# Altium PCB ESP8266_V1.0.PcbDoc
Units mil, origin at the board's own origin, x right, y up, seen from the top; angles counter-clockwise.
Board outline 2292.91 x 1228.37 mil, 2 copper layers (Top Layer, Bottom Layer); 28 components, 37 nets, 164 pads, 164 vias.
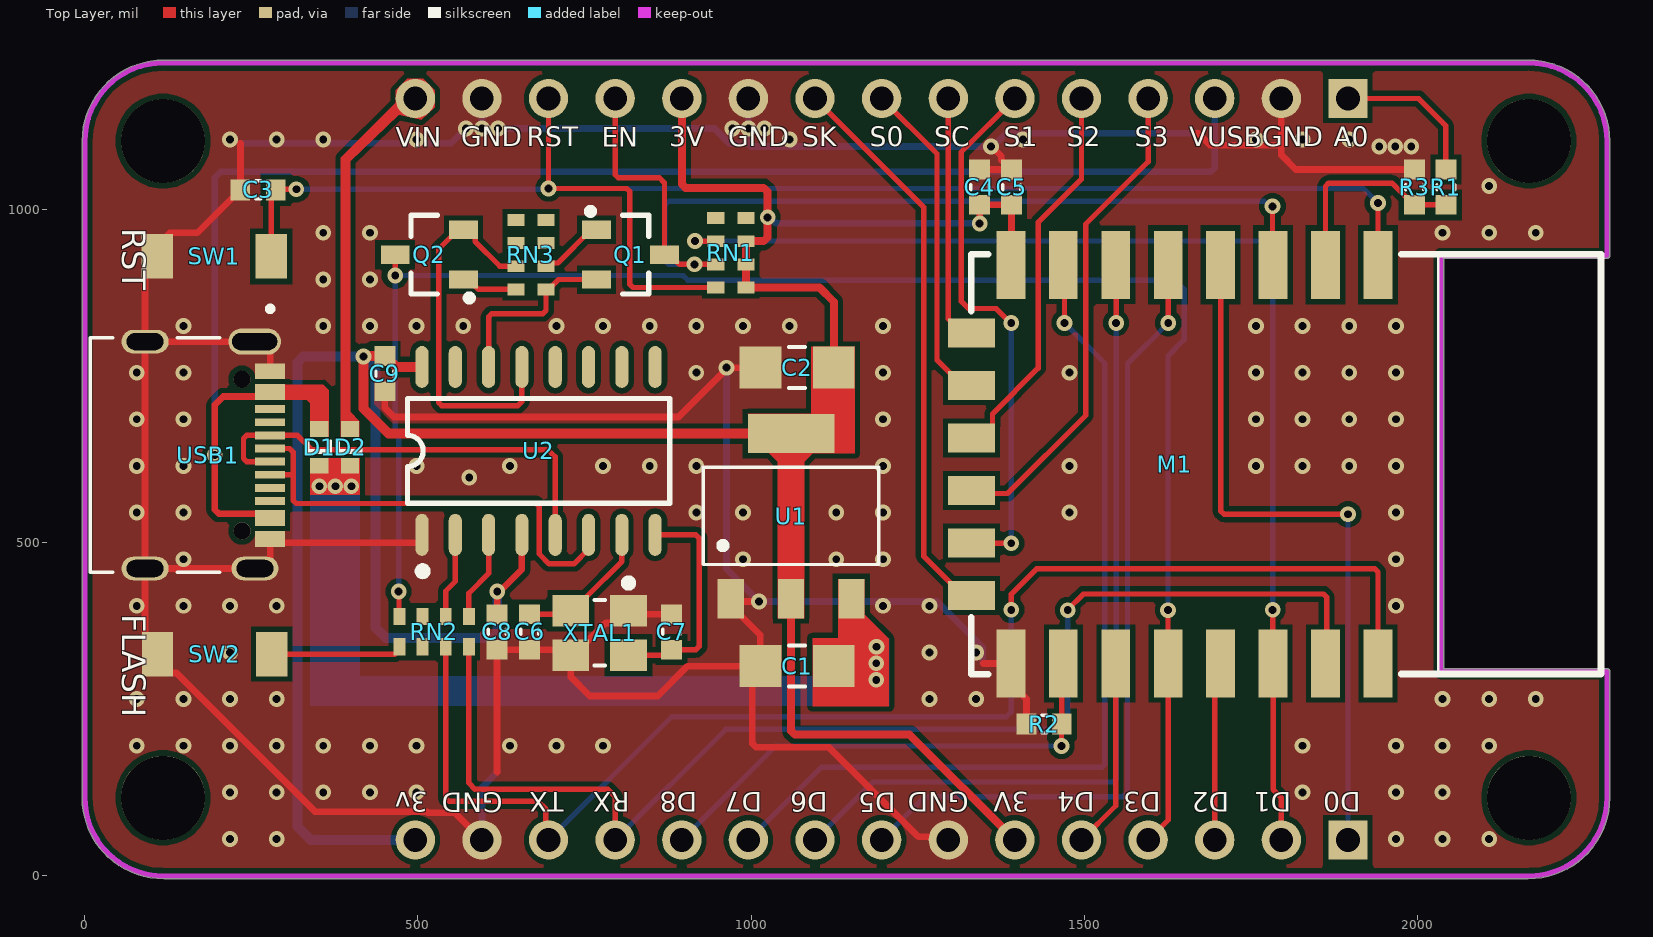
[diagram p0: Top Layer view]
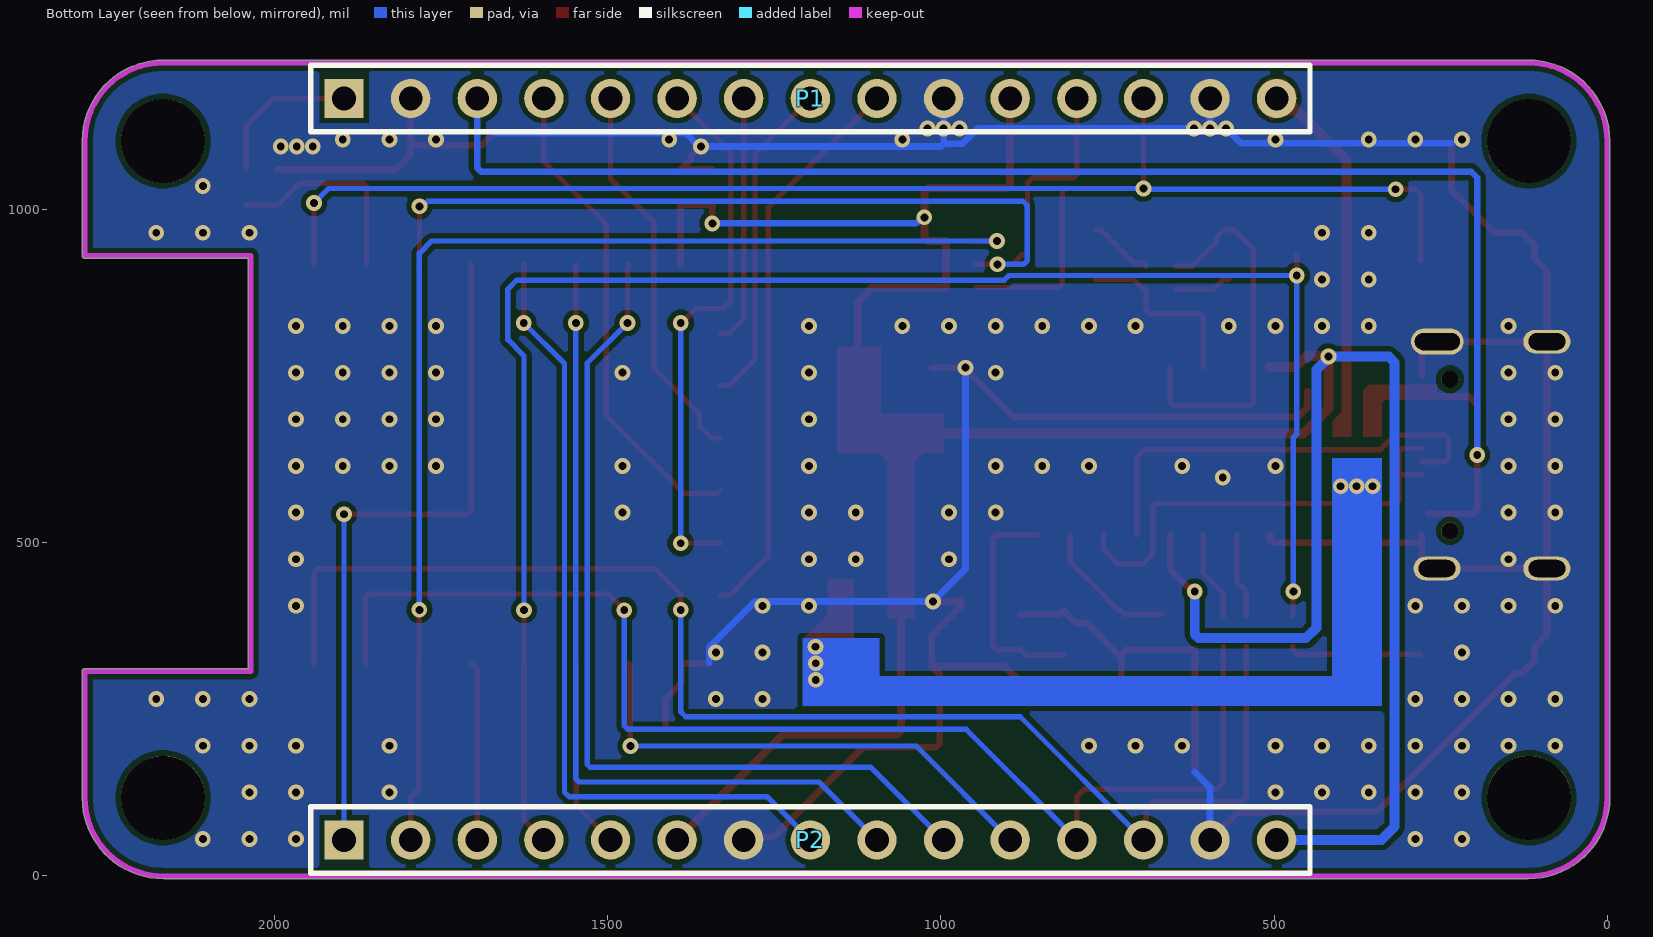
[diagram p1: Bottom Layer view, seen from below]
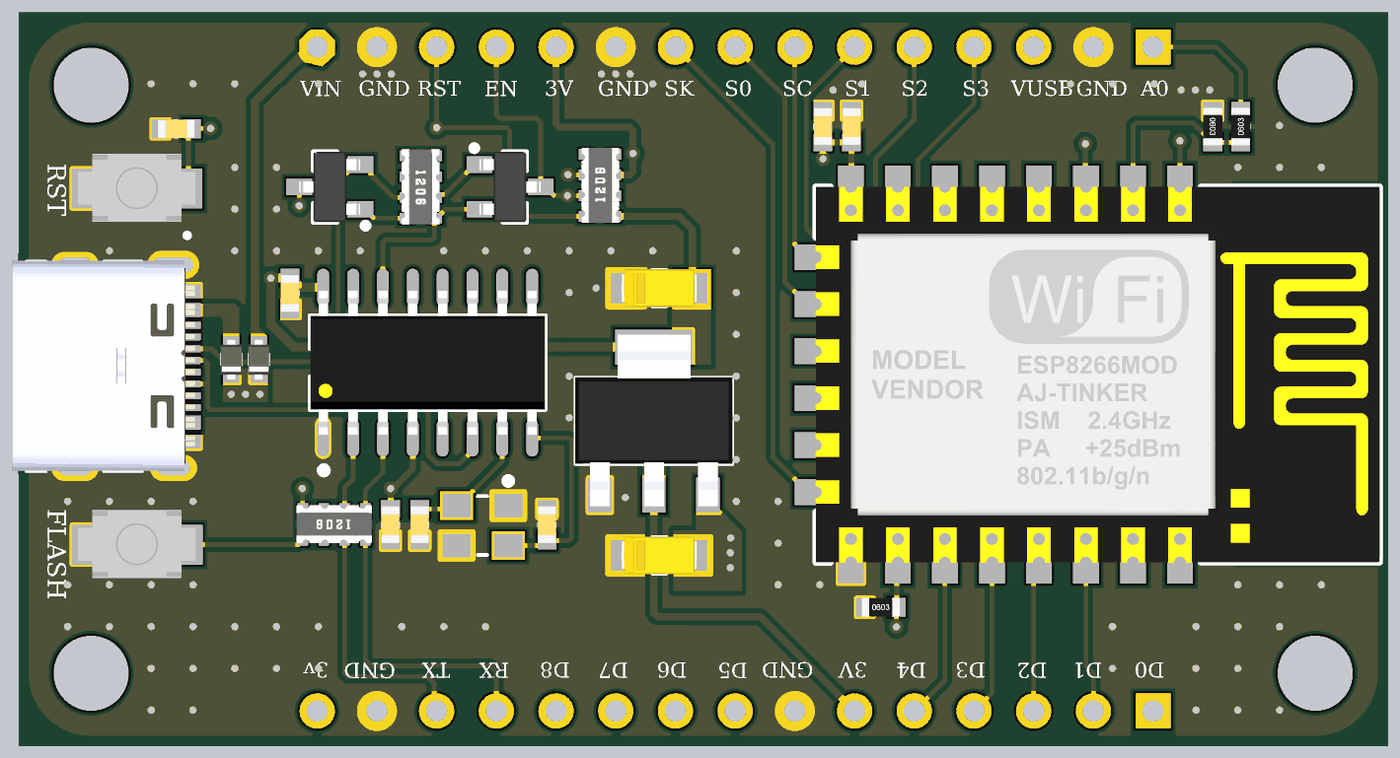
[diagram p2: 3D render of the assembled board from above, using the file's embedded part models]

## Layer stack, top to bottom
Top Solder: solder mask 0.4, Solder Resist, Dk 3.5
Top Layer: signal copper 1.4
Dielectric 1: dielectric 12.6, FR-4, Dk 4.8
Bottom Layer: signal copper 1.4
Bottom Solder: solder mask 0.4, Solder Resist, Dk 3.5

## Board outline
-3.96,118 -3.96,1103 -3.92,1103.55 cw(c117.34,1103.13) 118.15,1224.39 2166.24,1224.39 2166.75,1224.42 cw(c2167.57,1103.16) 2288.83,1103.16 2288.83,1102.12 2288.83,931 cw(c2284.88,931) 2284.88,927.05 2039.95,927.05 2039.95,310.95 2285,310.95 cw(c2285,307) 2288.95,307 2288.83,306.03 2288.83,117.88 2288.83,117.31 cw(c2167.57,117.31) 2166.75,-3.95 118.11,-3.95 cw(c117.3,117.31)

## Design rules (kind name [scope] priority, off if disabled: settings)
Clearance [All] p1: gap=8 ignorepadtopadclearanceinfootprint=TRUE
Clearance PWR [InNetClass('PWR')] p2: gap=10 ignorepadtopadclearanceinfootprint=TRUE
PolygonConnect [All] p1: connectstyle=Direct reliefconductorwidth=10 reliefentries=4 polygonreliefangle="90 Angle" airgapwidth=10
RoutingVias [All] p1: holewidth=28 width=50 viastyle="Through Hole" minholewidth=11.81 minwidth=23.62 maxholewidth=28 maxwidth=50
SolderMaskExpansion [All] p1: expansion=4 istentingtop=FALSE
Width PWR_W [InNetClass('PWR')] p1: maxlimit=30 minlimit=10 preferedwidth=20
Width [All] p2: maxlimit=15 minlimit=8 preferedwidth=10
30 further rules are at their usual default settings.

## Classes and differential pairs
net class PWR: +3V GND NetC1_1 V_USB VIN

## Components (designator, comment, footprint, x,y, rotation, side; value= is the part's Value field where it differs from the comment)
C1 "106/10uF_3216" "RESC TANTALUM- 1206 (3216)" 1069,315 r180 top
C2 "107J/100uF_3216" "RESC TANTALUM- 1206 (3216)" 1069,763 r180 top
C3 "104/50V_0603" "CAP - 0603 (1608)" 259,1030 r0 top
C4 "106/10V_0603" "CAP - 0603 (1608)" 1343,1034.91 r270 top
C5 "104/50V_0603" "CAP - 0603 (1608)" 1391,1034.91 r270 top
C6 "22p/50V_0603" "CAP - 0603 (1608)" 667.66,365.31 r90 top
C7 "22p/50V_0603" "CAP - 0603 (1608)" 880.66,367.31 r270 top
C8 "106/10V_0603" "CAP - 0603 (1608)" 618.66,365.31 r90 top
C9 "104/50V_0603" "CAP - 0603 (1608)" 450.34,753 r90 top
D1 "S4_SOD523" "SOD 523" 352,671 r270 top
D2 "S4_SOD523" "SOD 523" 398,671 r270 top
M1 "ESP-12E" "ESP-12E&F Module" 1636,618 r270 top
P1 "JP 15X1_MALE" "JP 2.54 15P" 1596,1167 r180 bottom
P2 "JP 15X1_MALE" "JP 2.54 15P" 1596,54 r180 bottom
Q1 "S8050_SOT23" "SOT23- C1815" 819,932.61 r0 top
Q2 "S8050_SOT23" "SOT23- C1815" 517,932.61 r180 top
R1 "220K_0603" "RESC - 0603 (1806)" 2043,1033.91 r90 top
R2 "10K_0603" "RESC - 0603 (1806)" 1440,228 r0 top
R3 "100K_0603" "RESC - 0603 (1806)" 1996,1033.91 r270 top
RN1 "RN_10K_1206" "RES ARRAY 1206" 992.28,883.22 r90 top
RN2 "RN_470R_1206" "RES ARRAY 1206" 576.43,389.31 r180 top
RN3 "RN_10K_1206" "RES ARRAY 1206" 647,984.78 r270 top
SW1 "BUTTON 3x4x2" "BUTTON 3x4x2" 108.74,930 r0 top
SW2 "BUTTON 3x4x2" "BUTTON 3x4x2" 109,333 r0 top
U1 "AMS1117_3.3V_SOT23-3" "SOT 233" 1060,536 r0 top
U2 "CH340G_SO-16" SO-16 681,638 r90 top
USB1 "USB_C_16P" USC16P 278.13,631.78 r270 top
XTAL1 "16MHZ_SMD3225" CRYSTALL_SMD_3225 782.75,374.84 r270 top

## Footprints (in the part's own frame and the unit in brackets; to place one, negate y for a bottom-side part, rotate by r counter-clockwise, add the part's x,y. Pads: shape width x height; smd on the part's side, far side on the other; paste and mask are expansions set on the pad)
"BUTTON 3x4x2" [mm]
  rect 1.2x1.7 smd: 1(0,0) 2(4.35,0)
  body extent -0.34,-1.42 4.66,1.48, height 2
"CAP - 0603 (1608)" [mm] "1608"
  rect 0.75x0.8 smd: 1(-0.65,0) 2(0.7,0)
  silkscreen extent -0.07,-0.34 0.13,0.34, body extent -0.77,-0.4 0.83,0.4, height 0.85
CRYSTALL_SMD_3225 [mm]
  rect 1.2x1.4 smd paste-0.1: 1(-0.596,0.846) 2(-0.596,-1.354) 3(1.104,-1.354) 4(1.104,0.846)
  silkscreen extent -1.79,-0.45 1.5,0.99, body extent -1,-1.85 1.5,1.35, height 0.61
"ESP-12E&F Module" [mm]
  rect 2.6x1.1 smd: 1(-7.6,7.75) 2(-7.6,5.75) 3(-7.6,3.75) 4(-7.6,1.75) 5(-7.6,-0.25) 6(-7.6,-2.25) 7(-7.6,-4.25) 8(-7.6,-6.25) 15(7.6,-6.25) 16(7.6,-4.25) 17(7.6,-2.25) 18(7.6,-0.25) 19(7.6,1.75) 20(7.6,3.75) 21(7.6,5.75) 22(7.6,7.75)
  rect 1.1x1.8 smd: 9(-5,-7.75) 10(-3,-7.75) 11(-1,-7.75) 12(1,-7.75) 13(3,-7.75) 14(5,-7.75)
  silkscreen extent -8.01,-7.76 8.01,16.25, body extent -8,-7.75 8.01,16.25, height 2.65
"JP 2.54 15P" [mm]
  rect 1.5x1.5 hole 0.9: 1(-7.62,0)
  round 1.5 hole 0.9: 2(-5.08,0) 3(-2.54,0) 4(0,0) 5(2.54,0) 6(5.08,0) 7(7.62,0) 8(10.16,0) 9(12.7,0) 10(15.24,0) 11(17.78,0) 12(20.32,0) 13(22.86,0) 14(25.4,0) 15(27.94,0)
  silkscreen extent -8.89,-1.27 29.21,1.27, body extent -8.89,-1.27 29.21,1.27, height 7
"RES ARRAY 1206" [mm]
  rect 0.45x0.65 smd: 1(0,0) 2(0.883,0) 3(1.767,0) 4(2.65,0) 5(2.65,1.15) 6(1.767,1.15) 7(0.883,1.15) 8(0,1.15)
  body extent -0.28,-0.25 2.92,1.36, height 0.45
"RESC - 0603 (1806)" [mm] "1608"
  rect 0.75x0.8 smd: 1(-0.675,0) 2(0.675,0)
  silkscreen extent -0.1,-0.34 0.1,0.34, body extent -0.8,-0.4 0.8,0.4, height 0.43
"RESC TANTALUM- 1206 (3216)" [mm]
  rect 1.6x1.6 smd paste-0.15: 1(-1.4,0) 2(1.4,0)
  silkscreen extent -0.3,-0.78 0.3,0.78, body extent -1.6,-0.8 1.6,0.8, height 1.61
SO-16 [mm]
  oval 1.6x0.5 smd: 1(-3.2,4.445) 2(-3.2,3.175) 3(-3.2,1.905) 4(-3.2,0.635) 5(-3.2,-0.635) 6(-3.2,-1.905) 7(-3.2,-3.175) 8(-3.2,-4.445) 9(3.2,-4.445) 10(3.2,-3.175) 11(3.2,-1.905) 12(3.2,-0.635) 13(3.2,0.635) 14(3.2,1.905) 15(3.2,3.175) 16(3.2,4.445)
  silkscreen extent -4.88,-5 2,5, body extent -3.07,-4.99 3.07,4.98, height 1.77
"SOD 523" [mm]
  rect 0.6x0.7 smd: 1(0,0) 2(1.4,0)
  silkscreen extent 0.46,-0.43 0.94,0.43, body extent -0.14,-0.45 1.56,0.45, height 0.76
"SOT23- C1815" [mm]
  rect 1.1x0.7 smd: 1(-1.3,0.95) 2(-1.3,-0.95) 3(1.3,0)
  silkscreen extent -1.65,-1.5 0.7,1.78, body extent -1.3,-1.5 1.3,1.5, height 1.1
"SOT 233" [mm]
  rect 1x1.5 smd: 1(2.3,-3.048) 2(-2.3,-3.048) 3(0,-3.048)
  rect 3.3x1.5 smd: 3(0,3.252)
  silkscreen extent -3.35,-1.74 3.35,1.96, body extent -3.35,-3.52 3.35,3.78, height 1.65
USC16P [mm]
  rect 0.3x1.14 smd: A1(3.05,0) A4(2.25,0) A5(1.25,0) A6(0.25,0) A7(-0.25,0) A8(-1.25,0) A9(-2.25,0) A12(-3.05,0) B1(-3.35,0) B4(-2.55,0) B5(-1.75,0) B6(-0.75,0) B7(0.75,0) B8(1.75,0) B9(2.55,0) B12(3.35,0)
  oval 1x2 hole 0.65 slot 1.72 at 90 deg: S1(-4.325,-0.59)
  oval 0.9x1.8 hole 0.65 slot 1.4 at 90 deg: S1(-4.325,-4.77) S1(4.325,-0.579) S1(4.325,-4.77)
  round 0.65 hole 0.65 unplated: ""(-2.89,-1.07) ""(2.89,-1.07)
  silkscreen extent -5.67,-6.86 4.47,0.1, body extent -4.5,-7.43 4.45,0.32, height 3.26

## Part data
C1: library part TANTALUM_3216_106C, "TAN_3216_106C _10UF_16V"
C2: library part TANTALUM_3216_107J, "TAN_3216_107J _100UF_16V"
C3 C5 C9: library part C0603C104K5RACTU, "CAP CER 0.1uF 50V 10% X7R 0603", Category=CAPACITOR, CMT=104/50V, MPN=C0603C104K5RACTU, PinCount=2, Solder=SMT
C4 C8: library part CL10A106KP8NNNC, "CAP CER 10uF 10% 10V X5R 0603", Category=CAPACITOR, CMT=106/10V, MPN=CL10A106KP8NNNC, PinCount=2, Solder=SMT
C6 C7: library part CL10C220JB8NNNC, "CAP CER 22pF 5% 50V C0G/NP0 0603", MPN=CL10C200JB8NNNC, Category=CAPACITOR, CMT=20p/50V/SMD, PinCount=2, Solder=SMT
D1 D2: library part 1N5819HW_S4_SOD523, "1N5819HW_S4_SOD523_DIODE SCHOTTKY_1A 40V"
M1: "ESP-12E Module", MFR=Espressif, Category=MODULE, MPN=ESP-12E, PinCount=22, Solder=SMT
P1 P2: library part "JP 15x1", "JUMP_MALE_15 Pin Pitch 2.54mm", MPN=S1012EC-40-ND, Solder=WAVE
Q1 Q2: library part S8050, "TRANS_NPN_0.5A_SOT23-3"
R1: library part RC0603FR-07220KL, "RES SMD 220K OHM 1% 1/10W 0603", Category=RESISTOR, CMT=220K, MPN=RC0603FR-07220KL, Solder=SMT
R2: library part RC0603FR-0710KL, "RES SMD 10K OHM 1% 1/10W 0603", Category=RESISTOR, CMT=10K, CompanyID=VT00464, MPN=RC0603FR-0710KL, Solder=SMT
R3: library part RC0603FR-07100KL, "RES SMD 100K OHM 1% 1/10W 0603", Category=RESISTOR, CMT=100K, MPN=RC0603FR-07100KL, Solder=SMT
RN1 RN3: library part "CHIP ARRAY RESISTOR 10K 1206", "CHIP ARRAY RESISTOR 10K 1206"
RN2: library part "CHIP ARRAY RESISTOR", "CHIP ARRAY RESISTOR 470R 1206"
U1: library part AMS1117-3.3
U2: library part CH340G, "USB<->UART"
USB1: Package=None, Availability="In Stock", Check_prices=https://www.snapeda.com/parts/CSP-USC16-TR/Valcon/view-part/?ref=eda, MF=Valcon, MP=CSP-USC16-TR, Price=None, Purchase-URL=https://pricing.snapeda.com/search/part/CSP-USC16-TR/?ref=eda, SnapEDA_Link=https://www.snapeda.com/parts/CSP-USC16-TR/Valcon/view-part/?ref=snap
XTAL1: library part 16MHZ, "CRYSTAL 16MHZ_SMD3225", MFR="Abracon LLC", MPN=ABM8G-25.000MHZ-18-D2Y-T, Category=CRYSTAL, CMT=25MHz, Solder=SMT

## Free pads (board coordinates)
  round 125.98 hole 125.98 unplated: 14(117.3,117.31) 14(117.34,1103.13) 14(2167.57,117.31) 14(2167.57,1103.16)

## Via types
v1: diameter 23.62, hole 11.81, Top Layer to Bottom Layer, tented both sides, 164 vias

## Nets (pads, with @x,y where several pads share a name; then routed paths per layer and width w, separated by ;. In a path a pad name is that pad's centre, name@x,y a point inside that pad or via, vN(x,y) a via of type N, cw(c..) or ccw(c..) an arc to the next point about the centre after c; other vN are vias at no path point)
+3V: C2.1 C4.2 C5.2 C8.2 C9.2 M1.8 P1.11 P2.6 P2.15 RN1.1 RN1.2 RN1.3 U1.3 U2.4 U2.16 | length 4777.6
  Top Layer w10: C8.2 619,393.23 v1(619,427) 622.69,427 656,460.31 U2.4 ; v1(1343.1,979.51) 1343.1,1007.24 C4.2 C5.2 1391,918.28 M1.8
  Top Layer w12: P1.11 896,1038.86 901.86,1033 1019.02,1033 1024.88,1027.14 1024.88,958.63 1019.02,952.78 RN1.3 RN1.2 RN1.1 1102.78,883.22 1124.12,861.88 C2.1 1097.62,736.5 1097.62,688.56 1073.09,664.03 U1.3@1060,664.03 ; U1.3@1011.17,683 1041.03,683 U1.3@1060,664.03 ; P2.6 1238,212 1065.86,212 1060,217.86 1060,416 U1.3@1060,664.03
  Top Layer w15: U2.16 467.91,763.98 451.32,780.57 C9.2 449.9,780.14 418.74,780.14 v1(418.3,779.7) 418.3,701.7 455.97,664.03 U1.3@1011.17,664.03
  Bottom Layer w10: v1@1023.78,988.63 1028.43,988.63 1037.55,979.51 v1(1343.1,979.51)
  Bottom Layer w15: P2.15 339,54 319,74 319,770.91 327.79,779.7 v1(418.3,779.7) 418.3,777.95 436.38,759.87 436.38,372.48 451.86,357 613.14,357 619,362.86 v1(619,427)
  other v1: 1024.88,988.63
A0: P1.1 R1.2 | length 229.5
  Top Layer w8: P1.1 2002,1167 2043,1126 R1.2
ADC: M1.2 R1.1 R3.2 | length 314.2
  Top Layer w8: M1.2 1862.38,1035.31 1867.06,1040 1962,1040 1965,1037 1965.35,1037 1995.02,1007.34 R3.2 R1.1
D+: U2.5 USB1.A6 USB1.B6 | length 672.4
  Top Layer w8: USB1.A6 242.69,621.94 238,626.62 238,656.62 242.69,661.31 USB1.B6 319.13,661.31 340.75,639.69 695.31,639.69 706,629 U2.5
D-: U2.6 USB1.A7 USB1.B7 | length 698.6
  Top Layer w8: USB1.A7 307.31,641.62 312.57,636.37 312.57,603.51 312.57,600.47 312.57,563.69 317.25,559 677.31,559 682,554.31 682,483.47 696.95,468.52 734.16,468.52 756,490.36 U2.6 ; USB1.B7@278.28,602.1 312.57,602.1
DTR: Q2.2 RN3.3 U2.13 | length 566.9
  Top Layer w8: RN3.3 622.97,915.22 585.83,952.36 585.83,960.23 576.06,970.01 560.31,970.01 531,940.71 531,710.69 535.69,706 650,706 656,712 U2.13
EN: M1.3 P1.12 Q1.3 RN1.7 | length 1520.4
  Top Layer w8: P1.12 796,1052.69 800.69,1048 862.49,1048 870.18,1040.31 Q1.3 878.06,932.61 892.67,918 RN1.7 ; v1(1782.7,1005.1) 1782.7,918.15 M1.3
  Bottom Layer w8: v1(915,918) 876.1,918 870.3,923.8 870.3,1006.3 876.8,1012.8 1770.77,1012.8 1778.47,1005.1 v1(1782.7,1005.1)
GND: C1.2 C2.2 C3.1 C4.1 C5.1 C6.1 C7.1 C8.1 C9.1 M1.15 P1.2 P1.10 P1.14 P2.7 P2.14 R2.1 R3.1 SW1.1 SW2.1 U1.2 U2.1 USB1.A1 USB1.A12 USB1.B1 USB1.B12 USB1.S1 XTAL1.1 XTAL1.3 | length 7373.9
  Top Layer w10: 234,1100 233.71,1099.71 233.71,1030.29 C3.1 233.43,1029.02 223.66,1019.25 222.68,1019.25 168.89,965.46 127.62,965.46 109,946.84 109,937 109,927.16 90.33,908.49 USB1.S1@90.33,802.06 ; USB1.A1 USB1.B12 ; USB1.A12 USB1.B1 278.13,788.49 264.56,802.06 254.9,802.06 USB1.S1@90.33,802.06 ; C9.1 450.34,702.66 464,689 891,689 963,761 v1(963,763) C2.2 ; U2.1 506,504.36 501.53,499.89 USB1.B12 ; P2.14 555,95 515.14,95 513.62,96.53 345.47,96.53 137.46,304.54 127.62,304.54 109,323.16 SW2.1 109,342.84 90.33,361.51 USB1.S1@90.33,461.5 ; 619,156 618.66,156.34 C8.1 C6.1 721.08,339.74 XTAL1.3 ; C7.1 821.48,392.89 XTAL1.1 797.43,379.68 781.68,379.68 733.38,331.38 XTAL1.3 ; v1(1012,412) 973.45,412 U1.2 969.45,406.16 1013.88,361.72 C1.2 ; P2.7 1291.33,58.67 1251.47,58.67 1117.14,193 1007.86,193 1002,198.86 1002,303.12 C1.2 ; C4.1 C5.1 1390.02,1060.49 1375.75,1074.76 1375.75,1080.25 1361,1095 v1(1360,1095) ; 1349,319 1389.72,319 M1.15 1389.94,289.26 1413.43,265.77 R2.1 ; 1668.9,1115 1670.83,1115 1688.82,1097.01 1796,1097.01 ; P1.2 1796,1097.01 ; R3.1 1817.51,1060.49 1796,1082 1796,1097.01 ; USB1.S1@90.33,461.5 255.33,461.5 266.16,461.5 278.13,473.46 USB1.B12 ; USB1.S1@90.33,461.5 90.33,611 90.33,635 90.33,659 USB1.S1@90.33,802.06 ; XTAL1.3 729.44,298.56 757.86,270.14 859.96,270.14 904.82,315 C1.2
  Bottom Layer w10: 234,1100 550,1100 v1(572,1122) ; v1@572,1125.86 575.86,1122 593.14,1122 v1@597,1125.86 ; P2.14 596,133 619,156 ; P1.14 596,1126.86 v1@597,1125.86 ; v1(620,1122) 945,1122 968.14,1098.86 996,1098.86 ; v1@620,1125.86 616.14,1122 600.86,1122 v1@597,1125.86 ; v1(963,763) 963,461 v1(1012,412) 1279,412 1348,343 1348,320 ; P1.10 v1(996,1122) 996,1098.86 ; 1668.9,1115.72 1668.18,1115 1383.13,1115 1363.13,1095 999.86,1095 996,1098.86
  other v1: 217.91,55.47 287.91,55.47 1967.91,55.47 2037.91,55.47 2107.91,55.47 217.91,125.47 287.91,125.47 357.91,125.47 427.91,125.47 497.91,125.47 1827.91,125.47 1967.91,125.47 2037.91,125.47 77.91,195.47 147.91,195.47 217.91,195.47 287.91,195.47 357.91,195.47 427.91,195.47 497.91,195.47 637.91,195.47 707.91,195.47 777.91,195.47 1827.91,195.47 1967.91,195.47 2037.91,195.47 2107.91,195.47 77.91,265.47 147.91,265.47 217.91,265.47 287.91,265.47 1267.91,265.47 1337.91,265.47 2037.91,265.47 2107.91,265.47 2177.91,265.47 217.91,335.47 1267.91,335.47 1337.91,335.47 77.91,405.47 147.91,405.47 217.91,405.47 287.91,405.47 1197.91,405.47 1267.91,405.47 1967.91,405.47 147.91,475.47 987.91,475.47 1127.91,475.47 1197.91,475.47 1967.91,475.47 77.91,545.47 147.91,545.47 917.91,545.47 987.91,545.47 1127.91,545.47 1197.91,545.47 1477.91,545.47 1967.91,545.47 577,598 77.91,615.47 147.91,615.47 497.91,615.47 637.91,615.47 777.91,615.47 847.91,615.47 917.91,615.47 1197.91,615.47 1477.91,615.47 1757.91,615.47 1827.91,615.47 1897.91,615.47 1967.91,615.47 77.91,685.47 147.91,685.47 1197.91,685.47 1757.91,685.47 1827.91,685.47 1897.91,685.47 1967.91,685.47 77.91,755.47 147.91,755.47 917.91,755.47 1197.91,755.47 1477.91,755.47 1757.91,755.47 1827.91,755.47 1897.91,755.47 1967.91,755.47 147.91,825.47 357.91,825.47 427.91,825.47 497.91,825.47 567.91,825.47 707.91,825.47 777.91,825.47 847.91,825.47 917.91,825.47 987.91,825.47 1057.91,825.47 1197.91,825.47 1757.91,825.47 1827.91,825.47 1897.91,825.47 1967.91,825.47 357.91,895.47 427.91,895.47 357.91,965.47 427.91,965.47 2037.91,965.47 2107.91,965.47 2177.91,965.47 2107.91,1035.47 1943,1095 1967,1095 1991,1095 217.91,1105.47 287.91,1105.47 357.91,1105.47 497.91,1105.47 1057.91,1105.47 1407.91,1105.47 1757.91,1105.47 1827.91,1105.47 1897.91,1105.47 596,1122 972,1122 1020,1122
GPIO0: M1.18 P2.4 Q2.3 RN2.4 | length 2588.2
  Top Layer w8: v1(465.8,901.3) Q2.3 ; v1@471,422.9 471.55,422.35 471.55,389.86 RN2.4 ; P2.4 1626.16,84.16 M1.18 1625.77,319.17 v1(1625.77,399.02)
  Bottom Layer w8: v1@471,422.9 471,658.01 465.8,663.21 v1(465.8,901.3) 898.03,901.3 905.14,894.19 1636.81,894.19 1650,881 1650,805 1625.77,780.77 v1(1625.77,399.02)
  other v1: 471,427
GPIO2: M1.17 P2.5 | length 286.1
  Top Layer w8: P2.5 1547.42,105.42 M1.17
GPIO4: M1.19 P2.3 | length 268.5
  Top Layer w8: P2.3 1696,309.89 M1.19
GPIO5: M1.20 P2.2 RN1.6 | length 1791.6
  Top Layer w8: v1(916,953) 916.11,952.89 946.89,952.89 RN1.6 ; v1(1782.9,399.4) 1782.9,319.52 M1.20 1783.64,129.66 1796,117.3 P2.2
  Bottom Layer w8: v1(916,953) 1764.4,953 1782.9,934.5 v1(1782.9,399.4)
GPIO12: M1.6 P2.9 | length 1258.8
  Top Layer w8: M1.6 1548,916.63 v1@1548,833
  Bottom Layer w8: P2.9 1183,141 1543.31,141 1548,145.69 v1(1548,830.08)
GPIO13: M1.7 P2.10 | length 1357.4
  Top Layer w8: M1.7 1470.49,915.4 v1(1470.49,830.08)
  Bottom Layer w8: P2.10 1105,163 1526.31,163 1531,167.69 1531,769.57 v1(1470.49,830.08)
GPIO14: M1.5 P2.8 | length 1210.6
  Top Layer w8: v1@1626.17,835.05 M1.5@1626.17,917.2
  Bottom Layer w8: P2.8 1261,119 1558.31,119 1565,125.69 1565,768.91 v1(1626.17,830.08)
GPIO15: M1.16 P2.11 R2.2 | length 752.9
  Top Layer w8: v1(1466,195) 1466,227.42 R2.2 1466.57,316.68 M1.16
  Bottom Layer w8: P2.11@896.26,54.26 1037,195 v1(1466,195)
GPIO16: M1.4 P2.1 | length 1051.4
  Top Layer w8: M1.4 1704.9,548 1709.9,543 v1(1896,543)
  Bottom Layer w8: P2.1 v1(1896,543)
NetC1_1: C1.1 D1.2 D2.2 U1.1 | length 198.1
  Top Layer w10: v1(352,585) D1.2 D2.2 ; C1.1 1150.55,341.43 1150.55,359.05 1161.8,370.3 1161.8,370.4 1150.55,381.65 U1.1
  other v1: 1188,294.3 1188,319.2 1188.4,344.1 376,585 400,585
NetQ1_1: Q1.1 RN3.6 | length 98.2
  Top Layer w8: RN3.6 697.13,920.08 710.01,920.08 759.94,970.01 Q1.1
NetQ2_1: Q2.1 RN3.4 | length 84.9
  Top Layer w8: Q2.1 576.06,895.21 590.82,880.45 RN3.4
RST: C3.2 M1.1 P1.13 RN1.8 SW1.2 | length 2396.2
  Top Layer w8: SW1.2@280,923 280,1023.43 287.35,1030.78 v1(317.41,1030.78) ; P1.13 v1(696,1032) 813.31,1032 818,1027.31 818,887.91 822.69,883.22 RN1.8 ; v1(1941,1010) 1941,917.33 M1.1
  Bottom Layer w8: v1(317.41,1030.78) 694.78,1030.78 v1(696,1032) 1919,1032 v1(1941,1010)
RTS: Q1.2 RN3.5 U2.14 | length 278.9
  Top Layer w8: U2.14 606,839.31 610.69,844 687.59,844 692.28,848.69 RN3.5 696.21,880.45 710.98,895.21 Q1.2
RX: M1.21 P2.12 RN2.8 | length 1922.9
  Top Layer w8: RN2.8 576.43,139.43 585.87,130 785,130 796,119 P2.12 ; v1(1475.38,399.02) 1475.38,399.78 1498.81,423.21 1859.21,423.21 1863.9,418.52 1863.9,320.31 M1.21
  Bottom Layer w8: P2.12 962,220 1470,220 1475.38,225.38 v1(1475.38,399.02)
RX_CH: RN2.1 U2.3 | length 135
  Top Layer w8: RN2.1 576.43,424.32 606,453.89 U2.3
S0: M1.10 P1.8 | length 494.8
  Top Layer w8: P1.8 1279,1084 1279,774.21 1317.1,736.11 M1.10
S1: M1.13 P1.6 | length 822.6
  Top Layer w8: M1.13 1331.29,499.48 v1(1390.63,499.48) v1@1396.06,499.48 ; v1(1390.63,830.08) 1389.71,830.08 1367.96,851.83 1326.17,851.83 1315.25,862.75 1315.25,1086.25 P1.6
  Bottom Layer w8: v1(1390.63,499.48) v1(1390.63,830.08)
S2: M1.11 P1.5 | length 586.1
  Top Layer w8: M1.11 1344.66,657.37 1362.31,675.02 1362.31,693.49 1431,762.17 1431,981 1496,1046 P1.5
S3: M1.12 P1.4 | length 736.4
  Top Layer w8: M1.12 1335.51,574 1385,574 1502.33,691.33 1502.33,978.33 1596,1072 P1.4
SC: M1.9 P1.7 | length 374.7
  Top Layer w8: P1.7 1296,835.95 1317.1,814.85 M1.9
SK: M1.14 P1.9 | length 851.2
  Top Layer w8: P1.9 1259,1004 1259,480 1299.45,439.55 1299.45,438.8 1317.1,421.15 M1.14
TX: M1.22 P2.13 RN2.7 | length 2088.5
  Top Layer w8: RN2.7 541.66,117.34 547,112 680.31,112 692,100.31 692,58 P2.13 ; v1(1390.63,399.4) 1390.63,423 1428.63,461 1936.43,461 1941.12,456.31 M1.22
  Bottom Layer w8: P2.13 881,239 1383,239 1390.63,246.63 v1(1390.63,399.4)
TX_CH: RN2.2 U2.2 | length 128.6
  Top Layer w8: RN2.2 541.66,427.66 556,442 U2.2
V_FLASH: RN2.5 SW2.2 | length 198.7
  Top Layer w8: SW2.2 465,333 472.1,340.1 RN2.5
V_USB: D1.1 P1.3 USB1.A4 USB1.A9 USB1.B4 USB1.B9 | length 2511.4
  Top Layer w10: USB1.A4@268.73,543.8 200.86,543.8 195,549.65 195,707 207.76,719.76 277.53,719.76 USB1.A9 ; USB1.B4@290,732.17 USB1.B4 ; USB1.B4@290,732.23 284.03,726.27 USB1.A9 ; D1.1 352,709 338,723 287.3,723 USB1.B4 ; USB1.A9 USB1.B4
  Bottom Layer w10: v1(195,632) 195,1048 204,1057 1690.14,1057 1696,1062.86 P1.3
VIN: D2.1 P1.15 | length 548.5
  Top Layer w10: D2.1 393.49,675.51 393.49,1078.49 467.51,1152.51 468.24,1152.51 482.73,1167 P1.15
XI: C6.2 U2.7 XTAL1.2 | length 211.8
  Top Layer w8: C6.2 724.02,392.89 XTAL1.2 733.38,398.31 753,417.93 753,419.14 806,472.14 U2.7
XO: C7.2 U2.8 XTAL1.4 | length 342.2
  Top Layer w8: XTAL1.4 872.3,331.38 C7.2 917.31,339.74 922,344.42 922,507.33 917.31,512.02 U2.8
pads on no net: RN1.4 RN1.5 RN2.3 RN2.6 RN3.1 RN3.2 RN3.7 RN3.8 U2.9 U2.10 U2.11 U2.12 U2.15 USB1. USB1.A5 USB1.A8 USB1.B5 USB1.B8

## Polygon pours and split planes (outlines as drawn)
GND on Top Layer "GND_L01_P000" (solid, remove dead copper, pour order 0): 118.11,-3.95 2188.83,-3.95 ccw(c2188.83,96.05) 2288.83,96.05 2288.83,1124.39 ccw(c2188.83,1124.39) 2188.83,1224.39 96.04,1224.39 ccw(c96.04,1124.39) -3.96,1124.39 -3.96,118 -3.96,96.02 ccw(c96.04,96.02) 96.04,-3.98 114.1,-3.98
GND on Bottom Layer "GND_L02_P001" (solid, remove dead copper, pour order 1): 118.11,-3.95 2188.83,-3.95 ccw(c2188.83,96.05) 2288.83,96.05 2288.83,1124.39 ccw(c2188.83,1124.39) 2188.83,1224.39 96.04,1224.39 ccw(c96.04,1124.39) -3.96,1124.39 -3.96,118 -3.96,96.02 ccw(c96.04,96.02) 96.04,-3.98 114.1,-3.98

## Keep-outs
Keep-Out Layer:
  lines w7.87: 0,118 0,1103 ; 0,118.11 ccw(c117.3,117.31) 118.1,0 ; 0.04,1102.33 cw(c117.34,1103.13) 118.15,1220.43 ; 118,0 2167,0 ; 118,1220.43 2166.57,1220.43 ; 2166.77,0 ccw(c2167.57,117.31) 2284.88,118.1 ; 2166.78,1220.47 cw(c2167.57,1103.16) 2284.88,1102.36 ; 2284.88,117.88 2284.88,306.88 2285,307 2036,307 2036,931 2284.88,931 2284.88,1102.12

## Other copper
Top Layer:
  rectangle net +3V: 995.04,634.5 1027.29,693.56
  rectangle net NetC1_1: 338.22,572 413,627.69
  region net +3V: 1079.69,386.47 1079.69,621.48 1092.71,634.5 1155.61,634.5 1155.61,794.5 1090.01,794.5 1090.01,693.56 995.04,693.56 1027.29,634.5 1040.31,621.48 1040.31,386.47
  region net VIN: 411.78,659.19 411.78,682.81 398,696.59 398,1073.06 471.26,1142.46 504.75,1134.83 525.53,1153.91 525.53,1179.23 508.23,1196.53 483.77,1196.53 466.47,1179.23 466.47,1160.47 384,1078 384,659.41 384.22,659.19
  region net V_USB: 255.68,737 357.56,737 365.78,728.78 365.78,659.19 338.22,659.19 338.22,682.81 338.22,709.78 333,715 255.68,715
  region net NetC1_1: 1092.62,255 1207,255 1207,356 1170.24,392.76 1170.24,445.53 1130.87,445.53 1130.87,357.1 1092.62,357.1
Bottom Layer:
  rectangle net NetC1_1: 1092,255 1207.8,357
  region net NetC1_1: 1207.8,255 1207.8,300 338,300 338,255
  rectangle net NetC1_1: 338.22,285 413,627.69

## Silkscreen, mask and mechanical layers (free items; w line width, h text height)
Top Overlay:
  text "GND" at 565,1085.37 h50
  text "RST" at 663,1085.37 h50
  text "3V" at 877,1085.37 h50
  text "GND" at 966,1085.37 h50
  text "SK" at 1077,1085.37 h50
  text "S0" at 1178,1085.37 h50
  text "SC" at 1274.8,1085.37 h50
  text "S1" at 1379,1085.37 h50
  text "S2" at 1474,1085.37 h50
  text "S3" at 1576,1085.37 h50
  text "VUSB" at 1658,1085.46 h50
  text "GND" at 1767,1085.37 h50
  text "A0" at 1875,1085.37 h50
  text "VIN" at 467,1084.95 h50
  text "EN" at 776,1084.95 h50
  text "RST" at 44.44,972 h60 r270
  text "FLASH" at 44.44,393 h60 r270
  text "3v" at 515,135.63 h50 r180
  text "TX" at 719,135.05 h50 r180
  text "RX" at 818,135.05 h50 r180
  text "D8" at 919,135.63 h50 r180
  text "D7" at 1017,135.05 h50 r180
  text "D6" at 1115,135.63 h50 r180
  text "GND" at 1327,135.63 h50 r180
  text "3V" at 1417,135.63 h50 r180
  text "D4" at 1516,135.05 h50 r180
  text "D3" at 1615,135.63 h50 r180
  text "D2" at 1718,135.05 h50 r180
  text "D1" at 1811,135.05 h50 r180
  text "D0" at 1915,135.63 h50 r180
  text "GND" at 627,134.63 h50 r180
  text "D5" at 1217,134.63 h50 r180